# EAGLE board USBMASS (EAGLE 5.07)
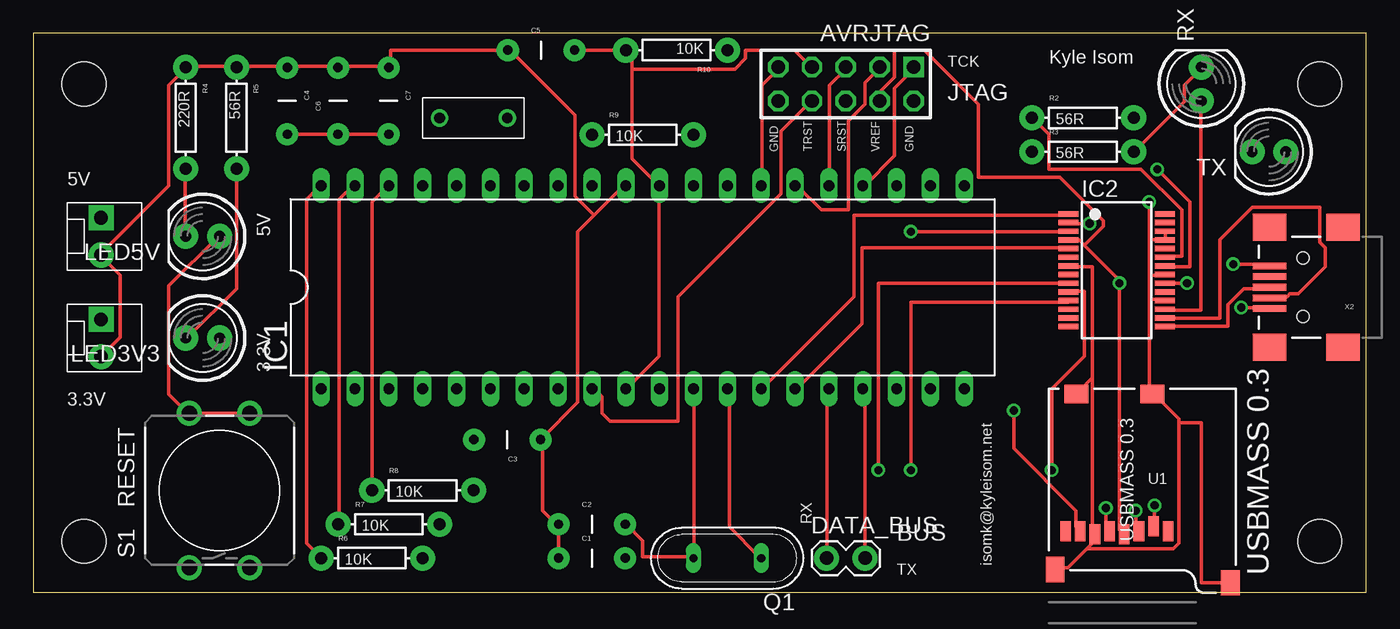
[diagram p0: board, top side]
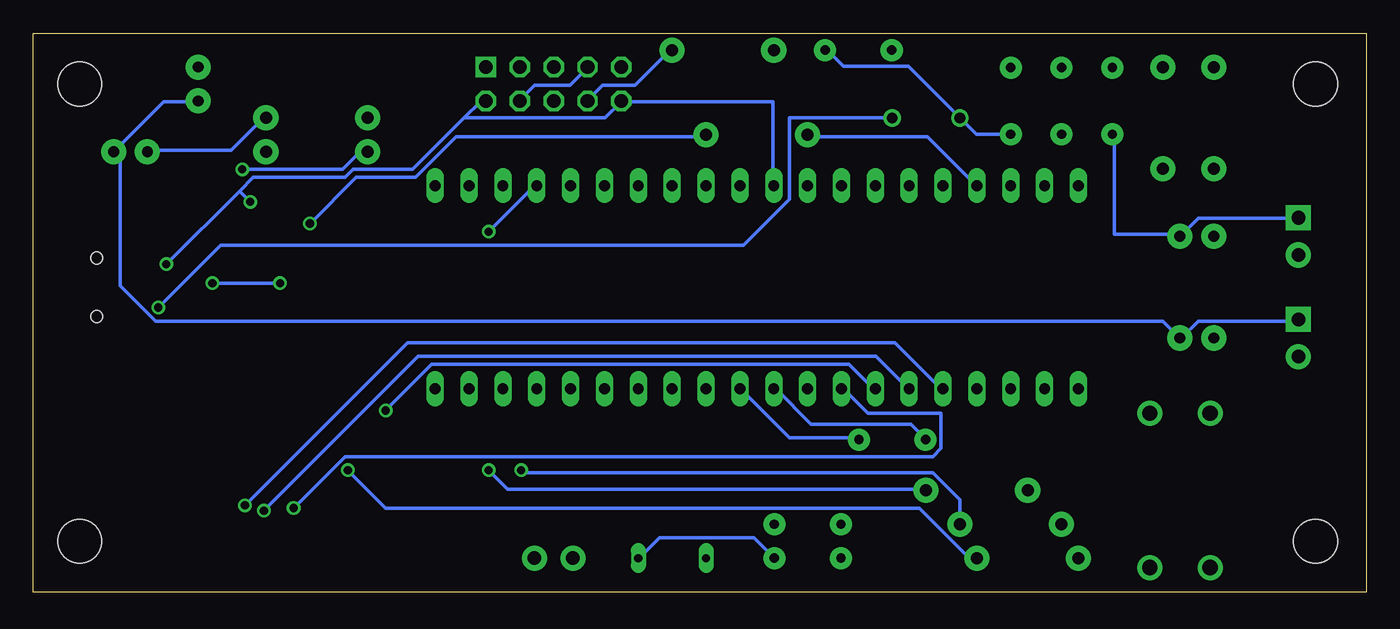
[diagram p1: board, bottom side, seen from below]

Size 100 x 41.9 mm. Coordinates in mm from the lower left corner, seen from the top.
Outline: 0,0 100,0 100,41.9 0,41.9 0,0
Copper layers (1*16): Top 0.035mm / dielectric 1.5mm / Bottom 0.035mm
Design rules "default": minimum track width 10mil, minimum drill 24mil, track to track 8mil, track to pad 8mil, pad to pad 8mil, via to via 8mil, smd to smd 8mil, copper to edge 40mil, drill to drill 8mil, minimum pad ring 10mil, minimum via ring 8mil, stop-mask expansion 4mil, vias tented up to drill 0mil, thermal gap 10mil

## Footprints (pad centres in the part's own frame; a part is rotated, then mirrored left to right if it is on the bottom)
MOLEX-1X2_LOCK = drill 1.016 pad 1.88 square: 1 -0.127,0 | drill 1.016 pad 1.88 round: 2 2.667,0
AVR-JTAG-10 = drill 1.016 square: 1 -5.08,-1.27 | drill 1.016 octagon: 2 -5.08,1.27; 3 -2.54,-1.27; 4 -2.54,1.27; 5 0,-1.27; 6 0,1.27; 7 2.54,-1.27; 8 2.54,1.27; 9 5.08,-1.27; 10 5.08,1.27
CAP-PTH-5MM = drill 0.7 pad 1.651 round: 1 -2.5,0; 2 2.5,0
1X02_LOCK = drill 1.016 pad 1.88 round: 1 -0.178,0; 2 2.718,0
PTC = drill 0.8 round: P$1 -2.54,0; P$2 2.54,0
DIL40 = drill 0.813 long: 1 -24.13,-7.62; 2 -21.59,-7.62; 3 -19.05,-7.62; 4 -16.51,-7.62; 5 -13.97,-7.62; 6 -11.43,-7.62; 7 -8.89,-7.62; 8 -6.35,-7.62; 9 -3.81,-7.62; 10 -1.27,-7.62; 11 1.27,-7.62; 12 3.81,-7.62; 13 6.35,-7.62; 14 8.89,-7.62; 15 11.43,-7.62; 16 13.97,-7.62; 17 16.51,-7.62; 18 19.05,-7.62; 19 21.59,-7.62; 20 24.13,-7.62; 21 24.13,7.62; 22 21.59,7.62; 23 19.05,7.62; 24 16.51,7.62; 25 13.97,7.62; 26 11.43,7.62; 27 8.89,7.62; 28 6.35,7.62; 29 3.81,7.62; 30 1.27,7.62; 31 -1.27,7.62; 32 -3.81,7.62; 33 -6.35,7.62; 34 -8.89,7.62; 35 -11.43,7.62; 36 -13.97,7.62; 37 -16.51,7.62; 38 -19.05,7.62; 39 -21.59,7.62; 40 -24.13,7.62
SSOP28 = smd 0.4 x 1.5: 1 -4.225,-3.625; 2 -3.575,-3.625; 3 -2.925,-3.625; 4 -2.275,-3.625; 5 -1.625,-3.625; 6 -0.975,-3.625; 7 -0.325,-3.625; 8 0.325,-3.625; 9 0.975,-3.625; 10 1.625,-3.625; 11 2.275,-3.625; 12 2.925,-3.625; 13 3.575,-3.625; 14 4.225,-3.625; 15 4.225,3.625; 16 3.575,3.625; 17 2.925,3.625; 18 2.275,3.625; 19 1.625,3.625; 20 0.975,3.625; 21 0.325,3.625; 22 -0.325,3.625; 23 -0.975,3.625; 24 -1.625,3.625; 25 -2.275,3.625; 26 -2.925,3.625; 27 -3.575,3.625; 28 -4.225,3.625
STAND-OFF = hole 3.302: 0,0
LED5MM = drill 0.813 pad 1.88 round: A -1.27,0; K 1.27,0
QS = drill 0.61 long: 1 -2.54,0; 2 2.54,0
AXIAL-0.3 = drill 0.9 pad 1.88 round: P$1 -3.81,0; P$2 3.81,0
TACTILE-PTH-12MM = drill 1.143 pad 1.88 round: 1 -5.791,2.261; 2 5.791,2.261; 3 -5.791,-2.261; 4 5.791,-2.261
MICRO-SD-SOCKET-PP = smd 0.8 x 1.5: 1 -8.94,10.7; 2 -7.84,10.3; 3 -6.74,10.7; 4 -5.64,10.9; 5 -4.54,10.7; 6 -3.44,10.9; 7 -2.34,10.7; 8 -1.24,10.7 | smd 1.8 x 1.4: CD1 -2.05,0.4; CD2 -7.75,0.4 | smd 1.4 x 1.9: GND1 -13.6,14.55; GND3 -0.45,13.55
USB-MINIB = smd 2.5 x 0.5: D+ 2.5,0; D- 2.5,0.8; GND 2.5,-1.6; ID 2.5,-0.8; VBUS 2.5,1.6 | smd 2.5 x 2: GND@1 -3,-4.5; GND@2 -3,4.5; GND@3 2.5,4.5; GND@4 2.5,-4.5 | hole 0.9: 0,2.2; 0,-2.2

## Placement (x,y rotation side)
3V3_PWR  [MOLEX-1X2_LOCK]  5.08,20.32 270 top
5V_PWR  [MOLEX-1X2_LOCK]  5.08,27.94 270 top
AVRJTAG  AVR-JTAG-10  [AVR-JTAG-10]  60.96,38.1 180 top
C1  0.1uF  [CAP-PTH-5MM]  41.91,2.54 0 top
C2  22pF  [CAP-PTH-5MM]  41.91,5.08 0 top
C3  0.1uF  [CAP-PTH-5MM]  35.56,11.43 180 top
C4  10uF  [CAP-PTH-5MM]  19.05,36.83 270 top
C5  0.1uF  [CAP-PTH-5MM]  38.1,40.64 0 top
C6  100nF  [CAP-PTH-5MM]  22.86,36.83 90 top
C7  0.1uF  [CAP-PTH-5MM]  26.67,36.83 270 top
DATA_BUS  [1X02_LOCK]  59.69,2.54 0 top
F1  PTCPTH  [PTC]  33.02,35.56 180 top
IC1  MEGA164P/324P/644P-PU  [DIL40]  45.72,22.86 0 top
IC2  FT232RL  [SSOP28]  81.28,24.13 270 top
JP1  STAND-OFF  [STAND-OFF]  3.81,38.1 0 top
JP2  STAND-OFF  [STAND-OFF]  96.52,3.81 0 top
JP3  STAND-OFF  [STAND-OFF]  96.52,38.1 0 top
JP4  STAND-OFF  [STAND-OFF]  3.81,3.81 0 top
LED3V3  67-1059-ND  [LED5MM]  12.7,19.05 180 top
LED5V  67-1059-ND  [LED5MM]  12.7,26.67 180 top
Q1  20 MHz  [QS]  52.07,2.54 180 top
R2  56R  [AXIAL-0.3]  78.74,35.56 0 top
R3  56R  [AXIAL-0.3]  78.74,33.02 0 top
R4  220R  [AXIAL-0.3]  11.43,35.56 270 top
R5  56R  [AXIAL-0.3]  15.24,35.56 270 top
R6  10K  [AXIAL-0.3]  25.4,2.54 0 top
R7  10K  [AXIAL-0.3]  26.67,5.08 0 top
R8  10K  [AXIAL-0.3]  29.21,7.62 0 top
R9  10K  [AXIAL-0.3]  45.72,34.29 0 top
R10  10K  [AXIAL-0.3]  48.26,40.64 180 top
RX  67-1121-ND  [LED5MM]  87.63,38.1 90 top
S1  [TACTILE-PTH-12MM]  13.97,7.62 90 top
TX  67-1059-ND  [LED5MM]  92.71,33.02 180 top
U1  USD-SOCKETNEW  [MICRO-SD-SOCKET-PP]  76.2,15.24 180 top
X2  USBSMD  [USB-MINIB]  95.25,22.86 180 top

## Library data of the parts
3V3_PWR 5V_PWR C1-C7 DATA_BUS F1 JP1-JP4 LED3V3 LED5V R2-R10 RX S1 TX U1 X2 = SparkFun
AVRJTAG IC1 = avr-6
IC2 = ftdichip
Q1 = special

## Nets
3.3V: 3V3_PWR.1 IC2.17 LED3V3.A RX.A TX.A
AREF: IC1.32
GND: 3V3_PWR.2 5V_PWR.2 AVRJTAG.2 AVRJTAG.10 C1.1 C2.1 C3.1 C4.1 C5.1 C6.2 C7.1 IC1.11 IC1.31 IC2.7 IC2.18 IC2.21 IC2.25 IC2.26 R4.P$1 R5.P$1 U1.6 U1.CD1 U1.CD2 U1.GND1 U1.GND3 X2.GND
N$1: AVRJTAG.1 IC1.24 IC2.3
N$2: AVRJTAG.8 IC1.9 R10.P$1
N$3: C2.2 IC1.12 Q1.2
N$4: C1.2 IC1.13 Q1.1
N$5: R2.P$2 TX.K
N$6: R3.P$2 RX.K
N$7: F1.P$1 X2.VBUS
N$8: IC2.16 X2.D-
N$9: IC2.15 X2.D+
N$10: IC2.22 R3.P$1
N$11: IC2.23 R2.P$1
N$12: LED5V.K R4.P$2
N$13: LED3V3.K R5.P$2
N$14: IC1.14 IC2.1
N$15: IC1.15 IC2.5
N$16: IC2.2 R9.P$2
N$17: IC1.37 R9.P$1
N$18: IC1.38 R8.P$1
N$19: IC1.39 R7.P$1
N$20: IC1.40 R6.P$1
N$21: IC2.11 R8.P$2
N$22: IC2.9 R7.P$2
N$23: IC2.10 R6.P$2
N$24: IC1.8 U1.5
N$25: IC1.7 U1.7
N$26: IC1.6 U1.3
N$27: IC1.5 U1.2
N$28: DATA_BUS.1 IC1.16
N$29: DATA_BUS.2 IC1.17
N$30: AVRJTAG.5 IC1.25
N$31: AVRJTAG.3 IC1.26
N$32: AVRJTAG.9 IC1.27
VCC: 5V_PWR.1 AVRJTAG.4 AVRJTAG.7 C3.2 C4.2 C5.2 C6.1 C7.2 F1.P$2 IC1.10 IC1.30 IC2.4 IC2.20 LED5V.A R10.P$2 S1.2 S1.4 U1.4

## Tracks (layer width: path | path; a pad name or v marks a point on that pad's centre or on a via)
3.3V
  Top 0.254: IC2.17 84.94,21.13 87.58,21.13 87.58,36.78 RX.A
  Bottom 0.254: 3V3_PWR.1 5.08,20.32 12.6,20.32 13.82,19.1 LED3V3.A 15.24,20.32 90.83,20.32 93.47,22.96 93.47,32.92 93.88,32.92 TX.A 90.22,36.78 87.78,36.78 RX.A
GND  (via drill 0.61)
  Top 0.254: 3V3_PWR.2 5.08,17.68 6.5,19.1 6.5,23.77 5.08,25.2 5V_PWR.2 5.08,25.4 10.16,30.48 10.16,38 11.38,39.22 R4.P$1 11.58,39.42 15.24,39.42 | 15.24,39.42 18.9,39.42 C4.1 19.1,39.42 22.76,39.42 C6.2 22.96,39.42 26.62,39.42 C7.1 26.82,39.42 26.82,40.64 C5.1 35.76,40.64 40.64,35.76 40.64,29.67 42.06,28.25 | 15.24,39.42 R5.P$1 | IC2.26 84.94,27.03 84.94,26.42 IC2.25 84.73,26.42 83.72,26.42 | 83.72,21.95 84.73,21.95 IC2.18 | 83.72,23.57 83.72,21.95 | 83.72,23.57 83.92,23.77 84.73,23.77 IC2.21 | 83.72,26.42 83.72,23.57 | 83.72,21.95 83.72,15.24 83.92,15.04 U1.CD2 84.12,14.83 85.95,13.01 85.95,12.7 | 79.05,3.25 77.62,1.83 76.81,1.83 U1.GND3 | 79.05,3.25 79.45,3.66 79.45,4.27 U1.6 79.45,4.47 79.45,16.05 | 79.45,16.05 79.45,24.38 77.83,24.38 IC2.7 | 79.45,16.05 78.44,15.04 U1.CD1 | 85.95,12.7 85.95,3.66 85.55,3.25 79.05,3.25 | C1.1 39.42,2.64 C2.1 39.22,5.08 38.2,6.1 38.2,11.38 C3.1 38.2,11.58 40.84,14.22 40.84,27.03 42.06,28.25 | v90.02,24.59 92.66,24.59 X2.GND | 42.06,28.25 44.3,30.48 IC1.31 | v83.72,29.26 83.72,26.42 | U1.GND1 87.63,0.69 87.63,12.7 85.95,12.7
  Bottom 0.254: IC1.11 46.94,15.24 43.28,11.58 38.2,11.58 C3.1 | 55.88,36.78 44.5,36.78 44.5,30.48 IC1.31 | 84.53,30.07 83.52,31.09 76.61,31.09 76,31.7 71.53,31.7 67.67,35.56 | 84.53,30.07 v90.02,24.59 | 67.67,35.56 66.45,36.78 66.04,36.78 AVRJTAG.2 | 55.88,36.78 57.1,35.56 67.67,35.56 | 55.88,36.78 AVRJTAG.10 | 84.53,30.07 v83.72,29.26
N$1  (via drill 0.61)
  Top 0.254: v65.84,27.03 77.62,27.03 IC2.3 | AVRJTAG.1 66.04,39.22 64.62,37.8 64.62,32.72 62.38,30.48 IC1.24
  Bottom 0.254: v65.84,27.03 62.38,30.48 IC1.24
N$2
  Top 0.254: IC1.9 42.06,15.24 42.67,14.63 42.67,13.41 43.28,12.8 48.36,12.8 48.36,22.15 56.08,29.87 56.08,34.54 58.32,36.78 AVRJTAG.8
  Bottom 0.254: R10.P$1 52.22,40.64 54.86,38 57.3,38 58.32,36.98 AVRJTAG.8
N$3
  Top 0.254: C2.2 44.5,5.08 45.72,3.86 45.72,2.64 49.38,2.64 Q1.2 49.58,2.64 49.58,15.24 IC1.12
N$4
  Top 0.254: Q1.1 54.46,2.64 52.22,4.88 52.22,15.24 IC1.13
  Bottom 0.254: C1.2 44.5,2.64 45.92,4.06 53.03,4.06 54.46,2.64 Q1.1
N$5
  Bottom 0.254: R2.P$2 82.7,35.56 85.14,33.12 91.44,33.12 TX.K
N$6
  Top 0.254: R3.P$2 82.7,33.12 86.36,36.78 86.36,38 87.58,39.22 RX.K
N$7  (via drill 0.61)
  Top 0.254: v90.63,21.34 92.66,21.34 X2.VBUS
  Bottom 0.254: v90.63,21.34 85.95,26.01 46.74,26.01 43.28,29.46 43.28,35.56 F1.P$1
N$8
  Top 0.254: IC2.16 84.94,20.52 89,20.52 89,26.42 91.44,28.85 96.52,28.85 96.52,26.21 96.93,25.81 96.93,24.38 94.89,22.35 94.28,22.35 94.08,22.15 92.86,22.15 X2.D-
N$9
  Top 0.254: IC2.15 84.94,19.91 89.61,19.91 89.61,21.54 90.83,22.76 92.66,22.76 X2.D+
N$10  (via drill 0.61)
  Top 0.254: v84.33,31.7 86.77,29.26 86.77,24.38 84.94,24.38 IC2.22
  Bottom 0.254: v84.33,31.7 76.81,31.7 75.59,32.92 74.98,32.92 R3.P$1
N$11
  Top 0.254: IC2.23 84.94,25.2 86.16,25.2 86.16,28.65 83.11,31.7 76.2,31.7 76.2,34.34 74.98,35.56 R2.P$1
N$12
  Top 0.254: LED5V.K 11.38,26.82 11.38,31.7 R4.P$2
N$13
  Top 0.254: LED3V3.K 11.58,19.1 15.24,22.76 R5.P$2
N$14
  Top 0.254: IC2.1 77.62,28.25 61.57,28.25 61.57,22.15 54.66,15.24 IC1.14
N$15
  Top 0.254: IC2.5 77.62,25.81 62.18,25.81 62.18,20.12 57.3,15.24 IC1.15
N$16  (via drill 0.61)
  Top 0.254: v79.25,27.64 77.83,27.64 IC2.2
  Bottom 0.254: v79.25,27.64 75.79,31.09 71.32,31.09 68.28,34.14 49.58,34.14 R9.P$2
N$17
  Bottom 0.254: IC1.37 29.26,30.48 32.92,34.14 41.86,34.14 R9.P$1
N$18
  Top 0.254: IC1.38 26.62,30.48 25.4,29.26 R8.P$1
N$19
  Top 0.254: IC1.39 23.98,30.48 22.96,29.46 22.96,5.08 R7.P$1
N$20
  Top 0.254: IC1.40 21.54,30.48 20.52,29.46 20.52,3.66 21.54,2.64 R6.P$1
N$21  (via drill 0.61)
  Top 0.254: v65.84,9.14 65.84,21.74 77.62,21.74 IC2.11
  Bottom 0.254: v65.84,9.14 64.41,7.72 33.12,7.72 R8.P$2
N$22  (via drill 0.61)
  Top 0.254: v63.4,9.14 63.4,23.16 77.62,23.16 IC2.9
  Bottom 0.254: v63.4,9.14 63.2,8.94 32.51,8.94 30.48,6.91 R7.P$2
N$23  (via drill 0.61)
  Top 0.254: v76.4,9.14 76.4,15.24 78.84,17.68 78.84,22.55 77.83,22.55 IC2.10
  Bottom 0.254: v76.4,9.14 73.56,6.3 33.53,6.3 29.87,2.64 29.26,2.64 R6.P$2
N$24  (via drill 0.61)
  Top 0.254: v80.47,6.3 80.47,4.88 80.67,4.67 U1.5
  Bottom 0.254: v80.47,6.3 76.61,10.16 32.51,10.16 31.9,10.77 31.9,13.41 37.39,13.41 39.22,15.24 IC1.8
N$25  (via drill 0.61)
  Top 0.254: v73.56,13.61 73.56,10.77 78.23,6.1 78.23,4.88 78.44,4.67 U1.7
  Bottom 0.254: v73.56,13.61 70.1,17.07 38.81,17.07 36.98,15.24 IC1.7
N$26  (via drill 0.61)
  Top 0.254: v82.7,6.1 82.7,4.88 82.91,4.67 U1.3
  Bottom 0.254: v82.7,6.1 71.12,17.68 36.78,17.68 34.34,15.24 IC1.6
N$27  (via drill 0.61)
  Top 0.254: v84.12,6.5 84.12,5.08 U1.2
  Bottom 0.254: v84.12,6.5 71.93,18.69 35.36,18.69 31.9,15.24 IC1.5
N$28
  Top 0.254: IC1.16 59.54,15.24 59.54,2.64 DATA_BUS.1
N$29
  Top 0.254: IC1.17 62.38,15.24 62.38,2.64 DATA_BUS.2
N$30
  Top 0.254: IC1.25 59.74,30.48 59.74,38 60.96,39.22 AVRJTAG.5
N$31
  Top 0.254: IC1.26 57.3,30.48 59.13,28.65 61.16,28.65 61.16,35.36 62.38,36.58 62.38,38.2 63.4,39.22 AVRJTAG.3
N$32
  Top 0.254: IC1.27 54.66,30.48 54.66,38 55.88,39.22 AVRJTAG.9
VCC  (via drill 0.61)
  Top 0.254: C4.2 19.1,34.34 22.76,34.34 C6.1 22.96,34.34 26.62,34.34 C7.2 | S1.4 S1.2 11.58,13.41 10.16,14.83 10.16,22.96 13.82,26.62 LED5V.A | 78.84,26.01 78.44,26.42 77.83,26.42 IC2.4 | 78.84,26.01 81.48,23.37 v81.48,23.16 81.48,4.67 81.69,4.47 U1.4 | v86.56,23.16 84.94,23.16 IC2.20 | 46.94,30.48 44.91,32.51 44.91,39.22 | 44.91,39.22 44.91,40.23 44.5,40.64 R10.P$2 C5.2 | 44.91,39.22 52.63,39.22 53.44,40.03 53.44,40.64 57.1,40.64 58.32,39.42 AVRJTAG.7 | 46.94,30.48 46.94,17.68 44.5,15.24 IC1.10 | 46.94,30.48 IC1.30 | 78.84,26.01 80.26,27.43 80.26,27.84 77.01,31.09 70.92,31.09 70.92,36.58 66.85,40.64 64.62,40.64 64.62,38.61 63.6,37.59 63.6,36.98 AVRJTAG.4
  Bottom 0.254: C7.2 26.82,34.34 29.26,34.34 F1.P$2 34.34,39.42 39.22,39.42 40.44,40.64 C5.2 | 5V_PWR.1 5.08,28.04 12.6,28.04 LED5V.A 14.02,26.82 18.9,26.82 18.9,34.14 C4.2 | v81.48,23.16 v86.56,23.16 | IC1.10 44.3,15.24 41.66,12.6 34.14,12.6 33.12,11.58 C3.2 | AVRJTAG.7 58.52,39.22 59.74,38 62.38,38 63.4,36.98 AVRJTAG.4

## Text on the board
tPlace: Kyle Isom | TCK | JTAG | GND | TRST | SRST | VREF | GND | 5V | 5V | 3.3V | 3.3V | isomk@kyleisom.net | RESET | RX | BUS | USBMASS 0.3 | TX | USBMASS 0.3